# Altium PCB SAMV71_Xplained_Ultra.PcbDoc (part 2 of 7)
Units mm, origin at the board's own origin, x right, y up, seen from the top; angles counter-clockwise.
Board outline 90 x 135 mm, 8 copper layers (Top Layer LF-Signals, Ground Plane 1 (GND), Power Plane (VCC), Ground Plane 2 (GND), Signal Layer 1, Signal Layer 2, Ground Plane 3 (GND), Bottom Layer LF-Signals), stack 1.588 mm thick; 413 components, 342 nets, 1839 pads, 978 vias.
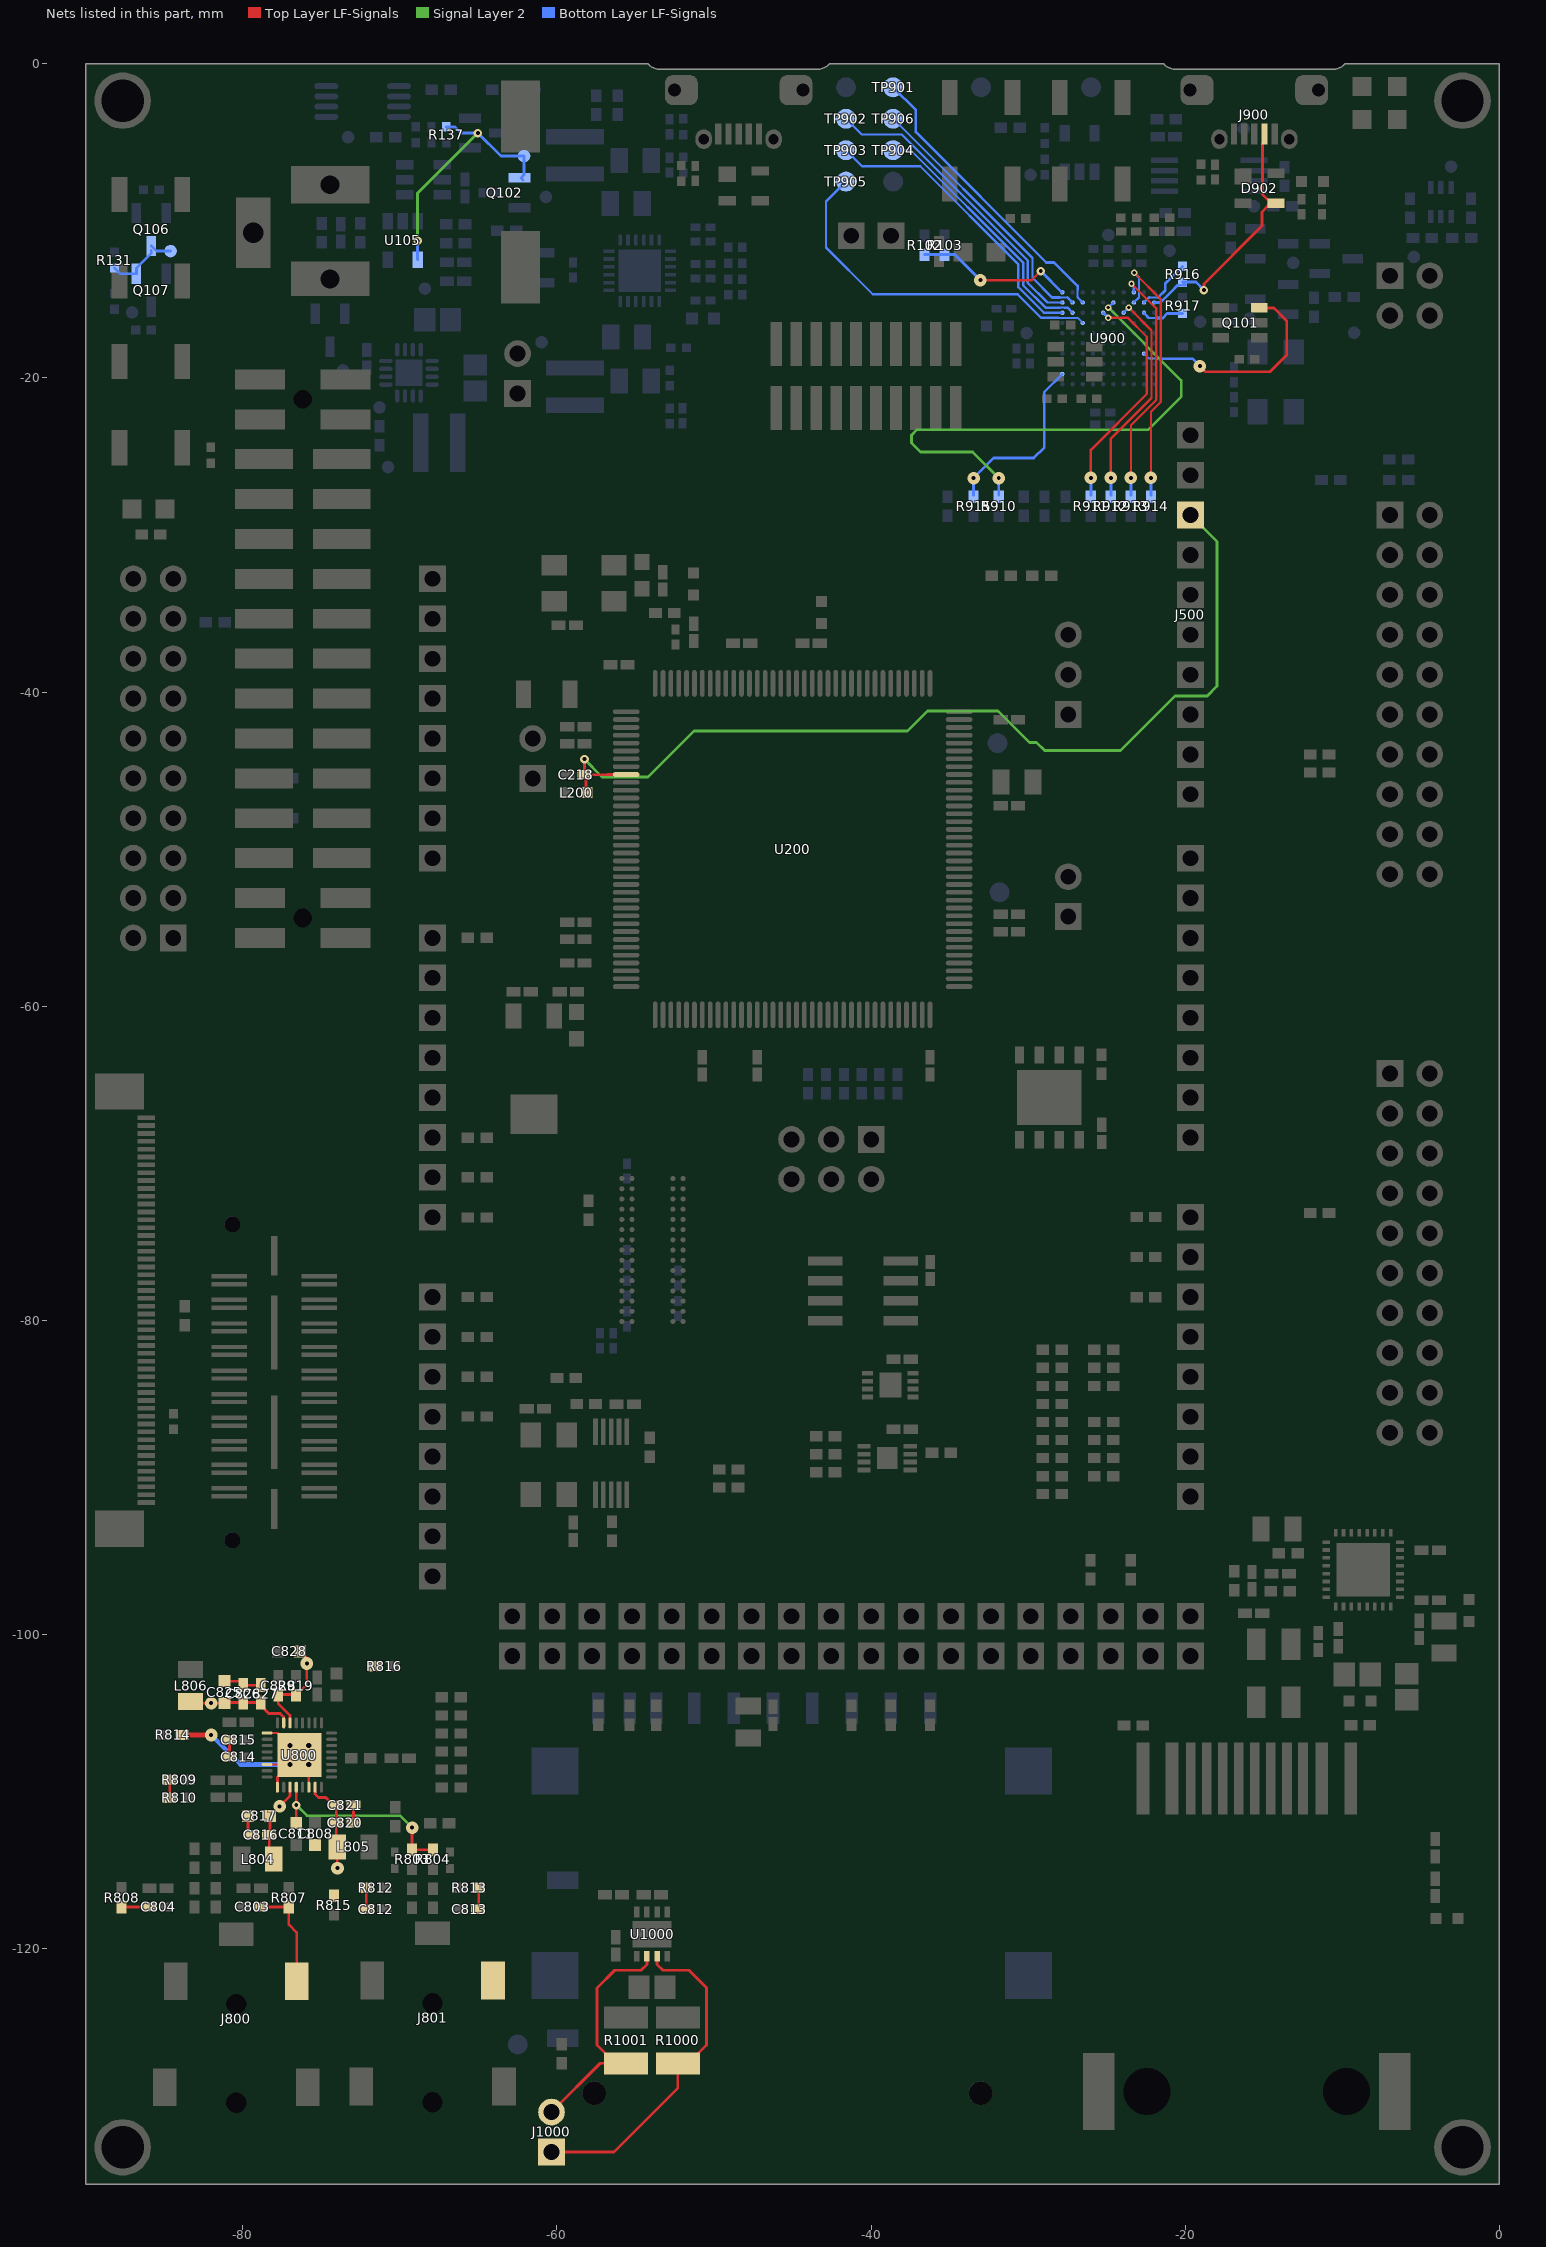
[diagram p8: the nets of this part, all layers, seen from the top]

## Footprints (in the part's own frame and the unit in brackets; to place one, negate y for a bottom-side part, rotate by r counter-clockwise, add the part's x,y. Pads: shape width x height; smd on the part's side, far side on the other; paste and mask are expansions set on the pad) (continued)
AP6-00206 [mm] "100 ball (10x10 array) VFBGA. Pitch 0.65 mm. Width: 7 mm. Length: 7mm. Height: 1 mm"
  round 0.28 smd: A1(-2.925,2.925) A2(-2.275,2.925) A3(-1.625,2.925) A4(-0.975,2.925) A5(-0.325,2.925) A6(0.325,2.925) A7(0.975,2.925) A8(1.625,2.925) A9(2.275,2.925) A10(2.925,2.925) B1(-2.925,2.275) B2(-2.275,2.275) B3(-1.625,2.275) B4(-0.975,2.275) B5(-0.325,2.275) B6(0.325,2.275) B7(0.975,2.275) B8(1.625,2.275) B9(2.275,2.275) B10(2.925,2.275) C1(-2.925,1.625) C2(-2.275,1.625) C3(-1.625,1.625) C4(-0.975,1.625) C5(-0.325,1.625) C6(0.325,1.625) C7(0.975,1.625) C8(1.625,1.625) C9(2.275,1.625) C10(2.925,1.625) D1(-2.925,0.975) D2(-2.275,0.975) D3(-1.625,0.975) D4(-0.975,0.975) D5(-0.325,0.975) D6(0.325,0.975) D7(0.975,0.975) D8(1.625,0.975) D9(2.275,0.975) D10(2.925,0.975) E1(-2.925,0.325) E2(-2.275,0.325) E3(-1.625,0.325) E4(-0.975,0.325) E5(-0.325,0.325) E6(0.325,0.325) E7(0.975,0.325) E8(1.625,0.325) E9(2.275,0.325) E10(2.925,0.325) F1(-2.925,-0.325) F2(-2.275,-0.325) F3(-1.625,-0.325) F4(-0.975,-0.325) F5(-0.325,-0.325) F6(0.325,-0.325) F7(0.975,-0.325) F8(1.625,-0.325) F9(2.275,-0.325) F10(2.925,-0.325) G1(-2.925,-0.975) G2(-2.275,-0.975) G3(-1.625,-0.975) G4(-0.975,-0.975) G5(-0.325,-0.975) G6(0.325,-0.975) G7(0.975,-0.975) G8(1.625,-0.975) G9(2.275,-0.975) G10(2.925,-0.975) H1(-2.925,-1.625) H2(-2.275,-1.625) H3(-1.625,-1.625) H4(-0.975,-1.625) H5(-0.325,-1.625) H6(0.325,-1.625) H7(0.975,-1.625) H8(1.625,-1.625) H9(2.275,-1.625) H10(2.925,-1.625) J1(-2.925,-2.275) J2(-2.275,-2.275) J3(-1.625,-2.275) J4(-0.975,-2.275) J5(-0.325,-2.275) J6(0.325,-2.275) J7(0.975,-2.275) J8(1.625,-2.275) J9(2.275,-2.275) J10(2.925,-2.275) K1(-2.925,-2.925) K2(-2.275,-2.925) K3(-1.625,-2.925) K4(-0.975,-2.925) K5(-0.325,-2.925) K6(0.325,-2.925) K7(0.975,-2.925) K8(1.625,-2.925) K9(2.275,-2.925) K10(2.925,-2.925)
  silkscreen extent -4.15,-4.15 4.15,4.15, body extent -3.5,-3.5 3.5,3.5, height 1.01
AP6-00313 [mm] "QFN, 16-Leads, Body 3,2x3,2mm (max), Pitch 0,50mm, IPC Medium Density"
  rect 1.7x1.7 smd paste-1.7: 0(0,0)
  oval 0.85x0.28 smd: 1(-1.475,0.75) 2(-1.475,0.25) 3(-1.475,-0.25) 4(-1.475,-0.75) 9(1.475,-0.75) 10(1.475,-0.25) 11(1.475,0.25) 12(1.475,0.75)
  oval 0.28x0.85 smd: 5(-0.75,-1.475) 6(-0.25,-1.475) 7(0.25,-1.475) 8(0.75,-1.475) 13(0.75,1.475) 14(0.25,1.475) 15(-0.25,1.475) 16(-0.75,1.475)
  silkscreen extent -2.17,-1.6 1.6,1.6, body extent -1.5,-1.5 1.5,1.5, height 0.9
AP6-00349 [mm] "QFN55-32LD-LP-1"
  rect 0.5x0.23 smd: 1(-2.35,1.75) 2(-2.35,1.25) 3(-2.35,0.75) 4(-2.35,0.25) 5(-2.35,-0.25) 6(-2.35,-0.75) 7(-2.35,-1.25) 8(-2.35,-1.75) 17(2.35,-1.75) 18(2.35,-1.25) 19(2.35,-0.75) 20(2.35,-0.25) 21(2.35,0.25) 22(2.35,0.75) 23(2.35,1.25) 24(2.35,1.75)
  rect 0.23x0.5 smd: 9(-1.75,-2.35) 10(-1.25,-2.35) 11(-0.75,-2.35) 12(-0.25,-2.35) 13(0.25,-2.35) 14(0.75,-2.35) 15(1.25,-2.35) 16(1.75,-2.35) 25(1.75,2.35) 26(1.25,2.35) 27(0.75,2.35) 28(0.25,2.35) 29(-0.25,2.35) 30(-0.75,2.35) 31(-1.25,2.35) 32(-1.75,2.35)
  rect 3.4x3.4 smd paste-1.7: 33(0,0)
  silkscreen extent -3,-3 3,3, body extent -2.51,-2.51 2.51,2.51, height 0.8
AP6-00380 [mm] "QFN24, 4x4mm, 0.5 pitch"
  round 0.6 on Bottom Paste: 0(-0.65,-0.65) 0(-0.65,0.65) 0(0,0) 0(0.65,-0.65) 0(0.65,0.65)
  rect 0.7x0.23 smd mask+0.05: 1(-1.95,1.25) 2(-1.95,0.75) 3(-1.95,0.25) 4(-1.95,-0.25) 5(-1.95,-0.75) 6(-1.95,-1.25) 13(1.95,-1.25) 14(1.95,-0.75) 15(1.95,-0.25) 16(1.95,0.25) 17(1.95,0.75) 18(1.95,1.25)
  rect 0.23x0.7 smd mask+0.05: 7(-1.25,-1.95) 8(-0.75,-1.95) 9(-0.25,-1.95) 10(0.25,-1.95) 11(0.75,-1.95) 12(1.25,-1.95) 19(1.25,1.95) 20(0.75,1.95) 21(0.25,1.95) 22(-0.25,1.95) 23(-0.75,1.95) 24(-1.25,1.95)
  rect 2.7x2.7 smd paste-2 mask+0.05: 25(0,0)
  silkscreen extent -2.47,-2.47 2.47,2.47, body extent -2,-2 2,2, height 1
AP6-00382 [mil] "VSSOP"
  oval 15x60 smd: 1(-38.39,-91.02) 2(-12.8,-91.02) 3(12.8,-91.02) 4(38.39,-91.02) 5(38.39,91.02) 6(12.8,91.02) 7(-12.8,91.02) 8(-38.39,91.02)
  silkscreen extent -95,-147 61,61, body extent -59,-96 59,97, height 37
AP6-00400 [mm] "FBGA60"
  round 0.32 smd mask+0.075: A1(-1.95,4.55) A2(-1.3,4.55) A6(1.3,4.55) A7(1.95,4.55) B1(-1.95,3.9) B2(-1.3,3.9) B6(1.3,3.9) B7(1.95,3.9) C1(-1.95,3.25) C2(-1.3,3.25) C6(1.3,3.25) C7(1.95,3.25) D1(-1.95,2.6) D2(-1.3,2.6) D6(1.3,2.6) D7(1.95,2.6) E1(-1.95,1.95) E2(-1.3,1.95) E6(1.3,1.95) E7(1.95,1.95) F1(-1.95,1.3) F2(-1.3,1.3) F6(1.3,1.3) F7(1.95,1.3) G1(-1.95,0.65) G2(-1.3,0.65) G6(1.3,0.65) G7(1.95,0.65) H1(-1.95,0) H2(-1.3,0) H6(1.3,0) H7(1.95,0) J1(-1.95,-0.65) J2(-1.3,-0.65) J6(1.3,-0.65) J7(1.95,-0.65) K1(-1.95,-1.3) K2(-1.3,-1.3) K6(1.3,-1.3) K7(1.95,-1.3) L1(-1.95,-1.95) L2(-1.3,-1.95) L6(1.3,-1.95) L7(1.95,-1.95) M1(-1.95,-2.6) M2(-1.3,-2.6) M6(1.3,-2.6) M7(1.95,-2.6) N1(-1.95,-3.25) N2(-1.3,-3.25) N6(1.3,-3.25) N7(1.95,-3.25) P1(-1.95,-3.9) P2(-1.3,-3.9) P6(1.3,-3.9) P7(1.95,-3.9) R1(-1.95,-4.55) R2(-1.3,-4.55) R6(1.3,-4.55) R7(1.95,-4.55)
  silkscreen extent -4.13,-5.3 3.45,5.3, body extent -3.25,-5.1 3.25,5.1, height 1.2
AP6-00402 [mm]
  rect 3.5x4.1 smd: 0(0,0)
  rect 1.1x0.6 smd: 1(-2.7,1.905) 2(-2.7,0.635) 3(-2.7,-0.635) 4(-2.7,-1.905) 5(2.7,-1.905) 6(2.7,-0.635) 7(2.7,0.635) 8(2.7,1.905)
  silkscreen extent -4.8,-2.7 3.5,2.7, body extent -3,-2.5 3,2.5, height 0.8
AP6-00407 [mm] "DFN8 package"
  rect 0.675x0.35 smd: 1(-1.412,0.975) 2(-1.412,0.325) 3(-1.412,-0.325) 4(-1.412,-0.975) 5(1.412,-0.975) 6(1.412,-0.325) 7(1.412,0.325) 8(1.412,0.975)
  rect 1.7x2.5 smd paste-3: 9(0,0)
  silkscreen extent -2.07,-1.75 1.95,1.88, body extent -1.55,-1.55 1.55,1.55, height 1
AP6-00409 [mm]
  rect 0.7x0.3 smd mask+0.075: 1(-1.45,0.75) 2(-1.45,0.25) 3(-1.45,-0.25) 4(-1.45,-0.75) 5(1.45,-0.75) 6(1.45,-0.25) 7(1.45,0.25) 8(1.45,0.75)
  rect 1.4x1.6 smd paste-0.025 mask+0.075: 9(0,0)
  silkscreen extent -2,-1.1 2,1.45, body extent -1.55,-1.05 1.55,1.05, height 0.6
AP6-00420 [mm] "QFN, 32-Leads, Body 4x4mm, Pitch 0.40mm, IPC Medium Density"
  oval 0.7x0.2 smd mask+0.05: 1(-2.05,1.4) 2(-2.05,1) 3(-2.05,0.6) 4(-2.05,0.2) 5(-2.05,-0.2) 6(-2.05,-0.6) 7(-2.05,-1) 8(-2.05,-1.4) 17(2.05,-1.4) 18(2.05,-1) 19(2.05,-0.6) 20(2.05,-0.2) 21(2.05,0.2) 22(2.05,0.6) 23(2.05,1) 24(2.05,1.4)
  oval 0.2x0.7 smd mask+0.05: 9(-1.4,-2.05) 10(-1,-2.05) 11(-0.6,-2.05) 12(-0.2,-2.05) 13(0.2,-2.05) 14(0.6,-2.05) 15(1,-2.05) 16(1.4,-2.05) 25(1.4,2.05) 26(1,2.05) 27(0.6,2.05) 28(0.2,2.05) 29(-0.2,2.05) 30(-0.6,2.05) 31(-1,2.05) 32(-1.4,2.05)
  rect 2.8x2.8 smd: 33(0,0)
  silkscreen extent -2.73,-2.1 2.1,2.15, body extent -2.08,-2.07 2.07,2.08, height 0.6
AP7-00039 [mm] "FOX FQ5032B"
  rect 1.6x1.3 smd: 1(-1.9,-1.15) 2(1.9,-1.15) 3(1.9,1.15) 4(-1.9,1.15)
  silkscreen extent -3,-2.1 3,2.1, body extent -2.5,-1.6 2.5,1.6, height 1
AP7-00044 [mm]
  rect 1x1.6 smd: 1(-1.3,0) 2(1.3,0)
  rect 3x2.5 smd: 3(0,6.25)
  silkscreen extent -2,-1 2,7.7, body extent -1.5,-0.7 1.5,7.4, height 2.08
AP7-00067 [mm]
  rect 2x1.2 smd: 1(-1.85,-1.1) 2(1.85,-1.1) 3(1.85,1.1) 4(-1.85,1.1)
  silkscreen extent -3.32,-2.15 3.2,2.05, body extent -2.5,-1.6 2.5,1.6, height 1
AP8-00010 [mm] "Testpad 50mil"
  round 1.27 smd paste-0.635: 1(0,0)
AP8-00137 [mm]
  rect 2.25x1 smd: 1(-2.75,2) 2(2.75,2) 3(-2.75,-2) 4(2.75,-2)
  silkscreen extent -4.25,-3.25 4.25,3.25, body extent -3.4,-3.21 3.4,3.22, height 3.47
AP8-00182 [mm] "Pin-in-Paste, Throughhole pin-header (2x3 array). Pitch 2.54 mm"
  rect 1.7x1.7 / inner round 1.7 / far side rect 1.7x1.7 hole 1: 1(-2.54,-1.27)
  rect 1.75x1.75 on Top Paste: 1(-2.54,-1.27) 2(-2.54,1.27) 3(0,-1.27) 4(0,1.27) 5(2.54,-1.27) 6(2.54,1.27)
  round 1.7 hole 1: 2(-2.54,1.27) 3(0,-1.27) 4(0,1.27) 5(2.54,-1.27) 6(2.54,1.27)
  silkscreen extent -3.8,-2.54 3.81,2.54, body extent -3.81,-2.54 3.81,2.54, height 8.56
AP8-00192 [mm]
  silkscreen extent -4,-4 3.86,4, body extent -3.97,-3.99 4,3.99, height 2.79
AP8-00259 [mm]
  rect 2.1x2.1 on Top Paste: 0(-21.59,-1.27) 0(-21.59,1.27) 0(-19.05,-1.27) 0(-19.05,1.27) 0(-16.51,-1.27) 0(-16.51,1.27) 0(-13.97,-1.27) 0(-13.97,1.27) 0(-11.43,-1.27) 0(-11.43,1.27) 0(-8.89,-1.27) 0(-8.89,1.27) 0(-6.35,-1.27) 0(-6.35,1.27) 0(-3.81,-1.27) 0(-3.81,1.27) 0(-1.27,1.27) 0(-1.27,-1.27) 0(1.27,1.27) 0(1.27,-1.27) 0(3.81,-1.27) 0(3.81,1.27) 0(6.35,-1.27) 0(6.35,1.27) 0(8.89,-1.27) 0(8.89,1.27) 0(11.43,-1.27) 0(11.43,1.27) 0(13.97,-1.27) 0(13.97,1.27) 0(16.51,-1.27) 0(16.51,1.27) 0(19.05,-1.27) 0(19.05,1.27) 0(21.59,-1.27) 0(21.59,1.27)
  rect 1.7x1.7 / inner round 1.7 / far side round 1.7 hole 1: 1(-21.59,-1.27) 2(-21.59,1.27) 3(-19.05,-1.27) 4(-19.05,1.27) 5(-16.51,-1.27) 6(-16.51,1.27) 7(-13.97,-1.27) 8(-13.97,1.27) 9(-11.43,-1.27) 10(-11.43,1.27) 11(-8.89,-1.27) 12(-8.89,1.27) 13(-6.35,-1.27) 14(-6.35,1.27) 15(-3.81,-1.27) 16(-3.81,1.27) 17(-1.27,-1.27) 18(-1.27,1.27) 19(1.27,-1.27) 20(1.27,1.27) 21(3.81,-1.27) 22(3.81,1.27) 23(6.35,-1.27) 24(6.35,1.27) 25(8.89,-1.27) 26(8.89,1.27) 27(11.43,-1.27) 28(11.43,1.27) 29(13.97,-1.27) 30(13.97,1.27) 31(16.51,-1.27) 32(16.51,1.27) 33(19.05,-1.27) 34(19.05,1.27) 35(21.59,-1.27) 36(21.59,1.27)
  silkscreen extent -23.3,-2.75 23.3,2.75, body extent -23.11,-2.53 23.11,2.43, height 8.52
AP8-00317 [mm] "Placement area for 18x6mm sticker"
  silkscreen extent 0,0 18,6
AP8-00367 [mm] "1x2 pin header, right angle, 2.54 mm pitch, through-hole"
  rect 1.7x1.7 / inner round 1.7 / far side round 1.7 hole 1: 1(-1.27,0) 2(1.27,0)
  silkscreen extent -2.65,-1.38 2.66,10.6, body extent -2.54,-0.33 2.54,9.99, height 2.55
AP8-00377 [mm]
  round 1.5 hole 1.5 unplated: 0(-12.575,14) 0(12.025,14)
  rect 0.8x2 smd paste+0 mask+0.2: 1(6.305,-10.5) 2(3.805,-10.5) 3(1.305,-10.5) 4(-1.195,-10.5) 5(-3.695,-10.5) 6(-6.195,-10.5) 7(-8.625,-10.5) 8(-10.325,-10.5) 9(8.805,-10.5) 10(-12.325,-10.5)
  rect 2x1.1 smd paste+0 mask+0.2: 11(-14.575,0.45) 12(-14.575,10.5)
  rect 3x3 smd paste+0 mask+0.2: 13(-15.075,-6.5) 14(-15.075,6.5) 15(15.075,6.5) 16(15.075,-6.5)
  silkscreen extent -14.1,-10.9 14.01,18.5, body extent -13.99,-9.5 14,18.5, height 2.7
AP8-00397 [mm] "3.5mm headphone jack"
  round 0 hole 1.3 unplated: 0(0,2.75) 0(0,-3.55)
  rect 1.5x2.4 smd: 1(-3.85,-5) 3(3.85,-5) 4(-4.55,1.75) 5(4.55,1.75)
  rect 2.2x1.5 smd: 2(0,-8)
  silkscreen extent -4.3,-7.75 4.3,7.75, body extent -4.59,-8.29 4.61,7.51, height 6
AP8-00525 [mm] "Jumper 2.54mm, 3D"
  body extent -2.49,0 2.49,5.97, height 2.52
AP8-00622 [mm] "2x10 Right angle 2.54mm THM"
  rect 1.7x1.7 / inner round 1.7 / far side rect 1.7x1.7 hole 1: 1(-11.43,-1.27)
  rect 2.1x2.1 on Top Paste: 1(-11.43,-1.27) 2(-11.43,1.27) 3(-8.89,-1.27) 4(-8.89,1.27) 5(-6.35,-1.27) 6(-6.35,1.27) 7(-3.81,-1.27) 8(-3.81,1.27) 9(-1.27,-1.27) 10(-1.27,1.27) 11(1.27,-1.27) 12(1.27,1.27) 13(3.81,-1.27) 14(3.81,1.27) 15(6.35,-1.27) 16(6.35,1.27) 17(8.89,-1.27) 18(8.89,1.27) 19(11.43,-1.27) 20(11.43,1.27)
  round 1.7 hole 1: 2(-11.43,1.27) 3(-8.89,-1.27) 4(-8.89,1.27) 5(-6.35,-1.27) 6(-6.35,1.27) 7(-3.81,-1.27) 8(-3.81,1.27) 9(-1.27,-1.27) 10(-1.27,1.27) 11(1.27,-1.27) 12(1.27,1.27) 13(3.81,-1.27) 14(3.81,1.27) 15(6.35,-1.27) 16(6.35,1.27) 17(8.89,-1.27) 18(8.89,1.27) 19(11.43,-1.27) 20(11.43,1.27)
  silkscreen extent -12.85,2.77 12.85,5.31, body extent -12.7,-1.59 12.7,11.29, height 5
AP8-00628 [mm] "2x2 Right angle 2.54mm THM"
  rect 1.7x1.7 / inner round 1.7 / far side rect 1.7x1.7 hole 1: 1(-1.27,-1.27)
  rect 2.1x2.1 on Top Paste: 1(-1.27,-1.27) 2(-1.27,1.27) 3(1.27,-1.27) 4(1.27,1.27)
  round 1.7 hole 1: 2(-1.27,1.27) 3(1.27,-1.27) 4(1.27,1.27)
  silkscreen extent -2.69,2.77 2.67,5.31, body extent -2.54,-1.52 2.54,11.36, height 5
AP8-00733 [mm] "Pin header 1x2 Pin in Paste"
  rect 1.7x1.7 / inner round 1.7 / far side rect 1.7x1.7 hole 1: 1(-1.27,0)
  rect 2.1x2.1 on Top Paste: 1(-1.27,0) 2(1.27,0)
  round 1.7 hole 1: 2(1.27,0)
  silkscreen extent -2.54,-1.48 2.54,1.48, body extent -2.54,-1.27 2.54,1.27, height 8.38
AP8-00744 [mm] "Pin header, 2x10, 2.54mm, THM, 1mm hole"
  rect 1.7x1.7 / inner round 1.7 / far side rect 1.7x1.7 hole 1: 1(-11.43,-1.27)
  rect 2.1x2.1 on Top Paste: 1(-11.43,-1.27) 2(-11.43,1.27) 3(-8.89,-1.27) 4(-8.89,1.27) 5(-6.35,-1.27) 6(-6.35,1.27) 7(-3.81,-1.27) 8(-3.81,1.27) 9(-1.27,-1.27) 10(-1.27,1.27) 11(1.27,-1.27) 12(1.27,1.27) 13(3.81,-1.27) 14(3.81,1.27) 15(6.35,-1.27) 16(6.35,1.27) 17(8.89,-1.27) 18(8.89,1.27) 19(11.43,-1.27) 20(11.43,1.27)
  round 1.7 hole 1: 2(-11.43,1.27) 3(-8.89,-1.27) 4(-8.89,1.27) 5(-6.35,-1.27) 6(-6.35,1.27) 7(-3.81,-1.27) 8(-3.81,1.27) 9(-1.27,-1.27) 10(-1.27,1.27) 11(1.27,-1.27) 12(1.27,1.27) 13(3.81,-1.27) 14(3.81,1.27) 15(6.35,-1.27) 16(6.35,1.27) 17(8.89,-1.27) 18(8.89,1.27) 19(11.43,-1.27) 20(11.43,1.27)
  silkscreen extent -12.7,-2.75 12.7,2.75, body extent -12.7,-2.54 12.7,2.54, height 8.4
AP8-00745 [mm] "THM Pin-header 1x3 100mil pitch, 1mm hole"
  rect 1.7x1.7 / inner round 1.7 / far side rect 1.7x1.7 hole 1: 1(-2.54,0)
  rect 2.1x2.1 on Top Paste: 1(-2.54,0) 2(0,0) 3(2.54,0)
  round 1.7 hole 1: 2(0,0) 3(2.54,0)
  silkscreen extent -3.81,-1.48 3.81,1.48, body extent -3.81,-1.27 3.81,1.27, height 8.38
AP8-00749 [mm]
  rect 0x0 hole 3 unplated: 0(-6.35,7.97) 0(6.35,7.97)
  rect 0.81x4.6 smd: 1(-6.61,-11.95) 2(-4.77,-11.95) 11(4.77,-11.95) 12(6.61,-11.95)
  rect 0.61x4.6 smd: 3(-3.57,-11.95) 4(-2.55,-11.95) 5(-1.53,-11.95) 6(-0.51,-11.95) 7(0.51,-11.95) 8(1.53,-11.95) 9(2.55,-11.95) 10(3.57,-11.95)
  rect 2x4.9 smd: 13(-9.42,7.97) 14(9.42,7.97)
  Top Layer LF-Signals region: -10.42,5.52 -10.42,10.42 -7.42,10.42 -7.42,9.484 -7.42,9.485 -7.419,9.48 -7.993,8.82 -8.2,7.97 -7.993,7.12 -7.419,6.46 -7.419,6.46 -7.42,6.46 -7.42,5.52
  Top Layer LF-Signals region: 7.42,5.52 7.42,6.456 7.419,6.46 7.993,7.12 8.2,7.97 7.993,8.82 7.419,9.48 7.419,9.48 7.42,9.48 7.42,10.42 10.42,10.42 10.42,5.52
  silkscreen extent -11,-14.7 11,13.25, body extent -9.65,-13.34 9.65,13.4, height 15.2
AP8-00774 [mm] "50 pin single sided FPC connector 5-1734839-0"
  rect 2.3x3.1 smd: 0(-13.92,0.3) 0(13.92,0.3)
  rect 0.3x1.1 smd: 1(-12.25,2) 2(-11.75,2) 3(-11.25,2) 4(-10.75,2) 5(-10.25,2) 6(-9.75,2) 7(-9.25,2) 8(-8.75,2) 9(-8.25,2) 10(-7.75,2) 11(-7.25,2) 12(-6.75,2) 13(-6.25,2) 14(-5.75,2) 15(-5.25,2) 16(-4.75,2) 17(-4.25,2) 18(-3.75,2) 19(-3.25,2) 20(-2.75,2) 21(-2.25,2) 22(-1.75,2) 23(-1.25,2) 24(-0.75,2) 25(-0.25,2) 26(0.25,2) 27(0.75,2) 28(1.25,2) 29(1.75,2) 30(2.25,2) 31(2.75,2) 32(3.25,2) 33(3.75,2) 34(4.25,2) 35(4.75,2) 36(5.25,2) 37(5.75,2) 38(6.25,2) 39(6.75,2) 40(7.25,2) 41(7.75,2) 42(8.25,2) 43(8.75,2) 44(9.25,2) 45(9.75,2) 46(10.25,2) 47(10.75,2) 48(11.25,2) 49(11.75,2) 50(12.25,2)
  silkscreen extent -15.51,-1.85 15.5,3.18, body extent -15.22,-2.55 15.21,2.56, height 2.03
AP8-00822 [mm]
  rect 1.7x1.7 / inner round 1.7 / far side round 1.7 hole 1: 1(-11.43,0) 2(-8.89,0) 3(-6.35,0) 4(-3.81,0) 5(-1.27,0) 6(1.27,0) 7(3.81,0) 8(6.35,0) 9(8.89,0) 10(11.43,0)
  rect 2.1x2.1 on Top Paste: 1(-11.43,0) 2(-8.89,0) 3(-6.35,0) 4(-3.81,0) 5(-1.27,0) 6(1.27,0) 7(3.81,0) 8(6.35,0) 9(8.89,0) 10(11.43,0)
  silkscreen extent -13.21,-1.4 13.21,1.4, body extent -12.95,-1.21 12.95,1.21, height 8.51
AP8-00823 [mm]
  rect 1.7x1.7 / inner round 1.7 / far side round 1.7 hole 1: 1(-8.89,0) 2(-6.35,0) 3(-3.81,0) 4(-1.27,0) 5(1.27,0) 6(3.81,0) 7(6.35,0) 8(8.89,0)
  rect 2.1x2.1 on Top Paste: 1(-8.89,0) 2(-6.35,0) 3(-3.81,0) 4(-1.27,0) 5(1.27,0) 6(3.81,0) 7(6.35,0) 8(8.89,0)
  silkscreen extent -10.67,-1.4 10.67,1.4, body extent -10.41,-1.21 10.41,1.21, height 8.51
AP8-00852 [mm] "Hirose, ZX Series, USB Micro-AB Recept-RA"
  rect 0.4x1.35 smd: 1(-1.3,2.8) 2(-0.65,2.8) 3(0,2.8) 4(0.65,2.8) 5(1.3,2.8)
  rrect52% 2.1x1.9 hole 0.825 slot 1.5 at 90 deg copper offset 0.437,0: 6(-4.088,0)
  rrect52% 2.1x1.9 on Top Paste: 6(-3.6,0) 7(3.6,0)
  rrect52% 2.1x1.9 hole 0.825 slot 1.5 at 90 deg copper offset -0.437,0: 7(4.088,0)
  rrect100% 1.05x1.25 hole 0.65 slot 0.85 at 90 deg: 8(-2.225,3.125) 9(2.225,3.125)
  rrect100% 1.05x1.25 on Top Paste: 8(-2.225,3.125) 9(2.225,3.125)
  Top Layer LF-Signals region: 0.25,-0.95 2.05,-0.95 2.05,0.95 0.25,0.95
  Top Layer LF-Signals region: -2.05,-0.95 -0.25,-0.95 -0.25,0.95 -2.05,0.95
  Top Layer LF-Signals region: 2.6,-0.95 4.2,-0.95 4.294,-0.941 4.381,-0.915 4.434,-0.891 4.48,-0.862 4.52,-0.832 4.565,-0.791 4.596,-0.753 4.622,-0.716 4.647,-0.673 4.66,-0.64 4.676,-0.6 4.688,-0.55 4.696,-0.505 4.7,-0.45 4.7,0.45 4.696,0.503 4.689,0.548 4.677,0.599 4.661,0.641 4.641,0.683 4.617,0.724 4.589,0.761 4.56,0.797 4.521,0.831 4.483,0.86 4.439,0.888 4.397,0.908 4.354,0.924 4.301,0.939 4.248,0.946 4.2,0.95 2.6,0.95
  Top Layer LF-Signals region: -2.6,0.95 -4.2,0.95 -4.294,0.941 -4.381,0.915 -4.434,0.891 -4.48,0.862 -4.52,0.832 -4.565,0.791 -4.596,0.753 -4.622,0.716 -4.647,0.673 -4.66,0.64 -4.676,0.6 -4.688,0.55 -4.696,0.505 -4.7,0.45 -4.7,-0.45 -4.696,-0.503 -4.689,-0.548 -4.677,-0.599 -4.661,-0.641 -4.641,-0.683 -4.617,-0.724 -4.589,-0.761 -4.56,-0.797 -4.521,-0.831 -4.483,-0.86 -4.439,-0.888 -4.397,-0.908 -4.354,-0.924 -4.301,-0.939 -4.248,-0.946 -4.2,-0.95 -2.6,-0.95
  Top Layer LF-Signals pour cut-out: -3.75,1.975 3.75,1.975 3.75,-1.325 -3.75,-1.325
  Bottom Layer LF-Signals region: -2.6,0.95 -4.2,0.95 -4.294,0.941 -4.381,0.915 -4.434,0.891 -4.48,0.862 -4.52,0.832 -4.565,0.791 -4.596,0.753 -4.622,0.716 -4.647,0.673 -4.66,0.64 -4.676,0.6 -4.688,0.55 -4.696,0.505 -4.7,0.45 -4.7,-0.45 -4.696,-0.503 -4.689,-0.548 -4.677,-0.599 -4.661,-0.641 -4.641,-0.683 -4.617,-0.724 -4.589,-0.761 -4.56,-0.797 -4.521,-0.831 -4.483,-0.86 -4.439,-0.888 -4.397,-0.908 -4.354,-0.924 -4.301,-0.939 -4.248,-0.946 -4.2,-0.95 -2.6,-0.95
  Bottom Layer LF-Signals region: 2.6,-0.95 4.2,-0.95 4.294,-0.941 4.381,-0.915 4.434,-0.891 4.48,-0.862 4.52,-0.832 4.565,-0.791 4.596,-0.753 4.622,-0.716 4.647,-0.673 4.66,-0.64 4.676,-0.6 4.688,-0.55 4.696,-0.505 4.7,-0.45 4.7,0.45 4.696,0.503 4.689,0.548 4.677,0.599 4.661,0.641 4.641,0.683 4.617,0.724 4.589,0.761 4.56,0.797 4.521,0.831 4.483,0.86 4.439,0.888 4.397,0.908 4.354,0.924 4.301,0.939 4.248,0.946 4.2,0.95 2.6,0.95
  silkscreen extent -4.05,1.22 4.05,3.13, body extent -4.32,-2.65 4.33,3.25, height 2.78
AP8-00853 [mm]
  rect 2.4x5 hole 1.2 slot 3 at 90 deg: 1(0,0)
  rect 4.5x2.2 hole 1.3 slot 3 at 0 deg: 2(3.05,-4.9)
  rect 2.2x5 hole 1.2 slot 3.5 at 90 deg: 3(6,0)
  silkscreen extent -7.2,-5 7.3,5, body extent -7.6,-5 6.88,4.47, height 11.18
AP8-00878 [mm] "SAMTEC 0.5mm, 20-pair, High-Speed Differential Pair Socket"
  round 1.02 hole 1.02 unplated: 0(-2.67,-10.06) 0(-2.67,10.06)
  rect 2.27x0.28 smd: 1(2.87,-7.25) 2(-2.87,-7.25) 3(2.87,-6.75) 4(-2.87,-6.75) 5(2.87,-5.75) 6(-2.87,-5.75) 7(2.87,-5.25) 8(-2.87,-5.25) 9(2.87,-4.25) 10(-2.87,-4.25) 11(2.87,-3.75) 12(-2.87,-3.75) 13(2.87,-2.75) 14(-2.87,-2.75) 15(2.87,-2.25) 16(-2.87,-2.25) 17(2.87,-1.25) 18(-2.87,-1.25) 19(2.87,-0.75) 20(-2.87,-0.75) 21(2.87,0.25) 22(-2.87,0.25) 23(2.87,0.75) 24(-2.87,0.75) 25(2.87,1.75) 26(-2.87,1.75) 27(2.87,2.25) 28(-2.87,2.25) 29(2.87,3.25) 30(-2.87,3.25) 31(2.87,3.75) 32(-2.87,3.75) 33(2.87,4.75) 34(-2.87,4.75) 35(2.87,5.25) 36(-2.87,5.25) 37(2.87,6.25) 38(-2.87,6.25) 39(2.87,6.75) 40(-2.87,6.75)
  rect 0.43x2.54 smd: 41(0,-8.065) 44(0,8.065)
  rect 0.43x4.7 smd: 42(0,-3.175) 43(0,3.175)
  silkscreen extent -3.9,-10.9 4.95,10.9, body extent -3.75,-10.67 3.75,10.64, height 3.05
AP8-00884 [mil]
  round 39.37 hole 46.85 unplated: 0(-650,0) 1(650,0)
  rect 50x125.98 smd: 1(-700,-107.01) 2(-700,107.01) 3(-600,-107.01) 4(-600,107.01) 27(600,-107.01) 28(600,107.01) 29(700,-107.01) 30(700,107.01)
  rect 50x145 smd: 5(-500,-97.5) 6(-500,97.5) 7(-400,-97.5) 8(-400,97.5) 9(-300,-97.5) 10(-300,97.5) 11(-200,-97.5) 12(-200,97.5) 13(-100,-97.5) 14(-100,97.5) 15(0,-97.5) 16(0,97.5) 17(100,-97.5) 18(100,97.5) 19(200,-97.5) 20(200,97.5) 21(300,-97.5) 22(300,97.5) 23(400,-97.5) 24(400,97.5) 25(500,-97.5) 26(500,97.5)
  Top Layer LF-Signals region: 575,-169.88 575,-25 607.28,-25 625,-42.72 625,-169.88
  Top Layer LF-Signals region: 725,-169.88 725,-25 692.72,-25 675,-42.72 675,-169.88
  Top Layer LF-Signals region: 575,169.88 575,25 607.28,25 625,42.72 625,169.88
  Top Layer LF-Signals region: 725,169.88 725,25 692.72,25 675,42.72 675,169.88
  Top Layer LF-Signals region: -575,169.88 -575,25 -607.28,25 -625,42.72 -625,169.88
  Top Layer LF-Signals region: -725,169.88 -725,25 -692.72,25 -675,42.72 -675,169.88
  Top Layer LF-Signals region: -575,-169.88 -575,-25 -607.28,-25 -625,-42.72 -625,-169.88
  Top Layer LF-Signals region: -725,-169.88 -725,-25 -692.72,-25 -675,-42.72 -675,-169.88
  silkscreen extent -760,-189 760,189, body extent -750,-145 750,145, height 380
AP8-00910 [mm] "FTSH-110-01-F-DV-007-K"
  rect 2.79x0.74 smd: 1(-2.035,5.715) 2(2.035,5.715) 3(-2.035,4.445) 4(2.035,4.445) 5(-2.035,3.175) 6(2.035,3.175) 7(-2.035,1.905) 8(2.035,1.905) 9(-2.035,0.635) 10(2.035,0.635) 11(-2.035,-0.635) 12(2.035,-0.635) 13(-2.035,-1.905) 14(2.035,-1.905) 15(-2.035,-3.175) 16(2.035,-3.175) 17(-2.035,-4.445) 18(2.035,-4.445) 19(-2.035,-5.715) 20(2.035,-5.715)
  silkscreen extent -4.59,-2.54 4.45,7.13, body extent -2.92,-6.31 2.92,6.31, height 6.11
AP9-00044 [mm]
  rect 1x0.95 smd paste-1: 1(-0.85,0) 2(0.85,0)
  Top Layer LF-Signals region: -0.45,-0.15 0.45,-0.15 0.45,0.15 -0.45,0.15
  silkscreen extent -1.6,-0.72 1.6,0.72, body extent -0.8,-0.4 0.8,0.4, height 0.3

## Part data
C100 C701 C703: library part A01-0500, "Ceramic capacitor, SMD 0805, X5R, 10V, ±20%"
C101: library part A01-0634, "Ceramic capacitor, SMD 0805, X5R, 25V, ±10%"
C102: library part A01-0044, "Ceramic capacitor, SMD 0402, X7R, 25V, +/-10%"
C103: library part A01-0679, "Electric Double-Layer (Supercapacitor), 100mF, SMD, 10.5mm diameter, 25Ω ESR"
C104: library part A01-0050, "Ceramic capacitor, SMD 0402, X7R, 25V, +/-10%"
C105 C106 C121 C122 C124 C125 C200 C201 C202 C203 C204 C205 C206 C207 C208 C209 C210 C211 C212 C213 C214 C217 C218 C600 C601 C602 C604 C605 C606 C607 C608 C609 C610 C611 C613 C700 C702 C705 C706 C707 C710 C711 C713 C801 C802 C806 C807 C816 C818 C821 C822 C826 C829 C904 C910 C911 C912 C913 C1002 C1003: library part A01-0246, "Ceramic capacitor, SMD 0402, X7R, 16V, +/-10%"
C107 C808 C811 C817 C819 C825 C828: library part A01-0377, "Ceramic capacitor, SMD 0603, X5R, 10V, 10% (de31036)"
C108 C109 C110 C111 C603 C810 C820 C905 C909 C914 C915: library part A01-0300, "Ceramic capacitor, SMD 0402, X5R, 6.3V, +/-20%"
C112 C113 C115 C117 C612: library part A01-0360, "Ceramic capacitor, SMD 0805, X5R, 10V, 10 %, (de19441)"
C114: library part A01-0014, "Ceramic capacitor, SMD 0402, NP0, 50V, +/-5%"
C116: library part A01-0013, "Ceramic capacitor, SMD 0402, NP0, 50V, +/-5%"
C118: library part A01-0021, "Ceramic capacitor, SMD 0402, NP0, 50V, +/-5%"
C119 C120 C805 C809: library part A01-0447, "Ceramic capacitor, SMD 0402, X5R, 10V, ±10 %"
C123 C1001: library part A01-0017, "Ceramic capacitor, SMD 0402, NP0, 50V, +/-5%"
C215: library part A01-0492, "Capacitor Tantalum 10V 2.2uF 10% ESR = 6 ohm"
C216 C708 C712: library part A01-0360, "Ceramic capacitor, SMD 0805, X7R, 10V, 10 %, (de19441)"
C219 C902: library part A01-0015, "Ceramic capacitor, SMD 0402, NP0, 50V, +/-5%"
C300 C301: library part A01-0011, "Ceramic capacitor, SMD 0402, NP0, 50V, +/-0.25pF"
C302 C303: library part A01-0016, "Ceramic capacitor, SMD 0402, NP0, 50V, +/-5%"
C304 C903: library part A01-0046, "Ceramic capacitor, SMD 0402, X7R, 25V, +/-10%"
C704 C709 C800 C900 C901: library part A01-0019, "Ceramic capacitor, SMD 0402, NP0, 50V, +/-5%"
C803 C804 C812 C813: library part A01-0034, "Ceramic capacitor, SMD 0402, X7R, 50V, +/-10%"
C814 C815: library part A01-0347, "Ceramic capacitor, SMD 0402, X5R, 6.3V, +/-20% (de33687)"
C823 C824: library part A01-0022, "Ceramic capacitor, SMD 0402, NP0, 50V, +/-5%"
C827 C906 C907 C908: library part A01-0321, "Ceramic capacitor, SMD 0402, C0G, 50V, +/-5%"
C1000: library part A01-0400, "Ceramic capacitor, SMD 0805, X5R, 25V, ±10 %"
D100: library part A04-0064, "Schottky double Diodes, NXP, SOT23-3"
D101: library part A04-0001, "Schottky diode, V(rrm)=30V, I(f)=0.1A, V(f)=0.4V (at If = 0.01A), I(r)=0.5uA (at Vrrm), t(rr)=5ns, SMD SOT23"
D300 D301 D901: library part A10-0019, "LED, Yellow, Wave length=591nm, SMD 0805, ±70°"
D302 D902: library part A06-0236, "Double rail-to-rail USB ESD protection diode"
D900: library part A10-0018, "LED, Green, Wave length=575nm, SMD 0805, ±70°"
E1 E2 E3 E4: library part A08-0053, "2.8mm adhesive feet,diam 8.0mm"
J100: library part A08-2120, "Through hole DC jack 2.1mm, 12V, 3A"
J101: library part A08-1519, "Pin header, 2x2, Right Angle, 2.54mm, THT, Pin In Paste"
J102: library part A08-0764, "1x2 pin header, right angle, 2.54 mm pitch, through-hole"
J103 J200 J201 J1000: library part A08-1754, "1x2 pin header, 2.54mm pitch, Pin-in-Paste THM"
J202: library part A08-1799, "1x3 pin header, 2.54mm pitch, Pin-in-Paste THM, 1mm hole"
J300 J301: library part A09-0783, "Default closed SMD strap, 0603 size"
J302 J900: library part A08-2112, "Micro USB AB Connector, Standard SMT + DIP"
J400: library part A08-2225, "Samtec TSM series, 2x15 pin header, straight, 2.54mm pitch SMD, locking leads."
J401 J402: library part A08-1513, "Pin header, 2x10, Right Angle, 2.54mm, THM, Pin In Paste"
J403: library part A08-2290, "SAMTEC FTSH series 50-mil header, shrouded, pin 7 removed, SMD"
J404: library part A08-1886, "50 pin FPC connector, e=0.5mm, single side contact (top)."
J405: library part A08-2204, "SAMTEC 0.5mm, 20-pair, High-Speed Differential Pair Socket"
J406: library part A08-1801, "2x10 pin header, 2.54mm pitch, Pin-in-Paste THM, 1mm hole"
J500: library part A08-2026, "1x10 receptacle pin header, low insertion force, 2.54mm pitch THM, Pin in Paste"
J501 J502 J503 J504 J505: library part A08-2025, "1x8 receptacle pin header, low insertion force, 2.54mm pitch THM, Pin in Paste"
J506: library part A08-1654, "2x3 pin header, 2.54mm pitch, Pin-in-Paste THM"
J507: library part A08-0387, "2x18 female pin header, 2.54mm pitch, THM"
J600: library part A08-0816, "SD/MMC socket, 2.7mm, push-push, SMD"
J700: library part A08-1816, "10/100Base-TX, SMD, RJ45, green and yellow LEDs, integrated magnetics"
J800 J801: library part A08-0886, "3.5mm stereo phone jack"
JS100 JS101 JS200 JS201 JS202: library part A08-0543, "Jumper cap for 2.54mm pinheader"
L100 L101 L102: library part A03-0197, "2.2µH Shielded Power Inductor, 4x4x2mm, Isat=5.6A , Irms=4.0A , DCR=35.2mΩ"
L200 L201 L202 L700 L701 L702 L900 L901: library part A03-0035, "SMD RF inductor 0603. Z=470Ohm (@100MHz), Max R(dc)=0.65Ohm, Max current=1A"
L800 L801 L802 L803: library part A03-0142, "FERRITE CHIP 80 OHM 1500MA 0402"
L804 L805 L806: library part A03-0167, "SMD EMI FERRITE 0805, Z=120 ohm(@100MHz), Max R(dc)=0.03 ohm, Max current=3A, (Digikey:490-5986-2-ND)"
LABEL1: library part A09-0611, "PCBA identification label PP Top White Gloss"
Q100: library part A05-0023, "P-ch. MOSFET. -30V, -3.0A continuous, -24A Peak. RDS(ON)=0.098Ohm@VGS=-10V, RDS(ON)=0.165Ohm@VGS=-4.5V, -2.5V<VGS(th)<-1.0V"
Q101 Q108: library part A05-0040, "Dual N/P-ch MOSFET, 20V, 2.7A/-1.9A cont, 8A/-8A pulse, RDS(ON)<0.08/0.17Ohm@VGS=4.5V, VGS(th)<1.5/-1.5V, SSOT6"
Q102: library part A05-0134, "P-channel Power MOSFET,30V, 520mA continuous drain current"
Q103 Q104 Q106: library part A05-0087, "P-ch. MOSFET. -30V, -3.7A continuous,RDS(ON)=0.05Ohm@VGS=-4,5V, RDS(ON)=0.08Ohm@VGS=-2.5V"
Q105 Q107: library part A05-0085, "N-Channel MOSFET. 60V, 0.300A continuous, 1.2A Peak. RDS(ON) = 3.8Ohm@VGS=4.5V, VGS(th)<2.5V"
Q900: library part A05-0051, "Dual N-Channel MOSFET, 60V, 115mA cont,RDS(ON) < 7.5 Ohm @50mA@5V, SOT-363"
R100 R920: library part A02-0163, "Thick film resistor, SMD 0402, 1/16W, 1%"
R101 R106 R114 R120 R121 R126 R134 R137 R140 R141 R142 R404 R604 R605 R607 R608 R609 R610 R702: library part A02-0260, "Thick film resistor, SMD 0402, 1/16W, 1%"
R102 R103 R119 R136 R306 R812 R813: library part A02-0252, "Thick film resistor, SMD 0402, 1/16W, 1%"
R104 R305: library part A02-0247, "Thick film resistor, SMD 0402, 1/16W, 1%"
R105 R116 R117 R127 R131 R135: library part A02-0276, "Thick film resistor, SMD 0402, 1/16W, 1%"
R107 R139 R302 R303 R307 R900 R904 R905 R907 R908 R910 R911 R912 R913 R914 R915 R921: library part A02-0200, "Thick film resistor, SMD 0402, 1/16W, 1%"
R108: library part A02-0204, "Thick film resistor, SMD 0402, 1/16W, 1%"
R109 R112 R200 R201 R202 R203 R207 R208 R209 R211 R213 R215 R216 R217 R218 R219 R220 R221 R222 R223 R224 R225 R226 R228 R229 R230 R234 R400 R401 R402 R403 R800 R802 R806 R811 R814 R815 R816 R818 R819: library part A02-0163, "RES 0.0 OHM 1/16W 0402 SMD"
R110 R204 R205 R206 R212 R214 R227 R300 R301 R817 R916 R917: library part A02-0178, "Thick film resistor, SMD 0402, 1/16W, 1%"
R111 R122: library part A02-0925, "Thick film resistor, SMD 0402, 1/16W, 1%"
R113 R304 R906 R909 R919: library part A02-0284, "Thick film resistor, SMD 0402, 1/16W, 1%"
R115: library part A02-0250, "Thick film resistor, SMD 0402, 1/16W, 1%"
R118: library part A02-0202, "Thick film resistor, SMD 0402, 1/16W, 1%"
R123: library part A02-0264, "Thick film resistor, SMD 0402, 1/16W, 1%"
R124: library part A02-0278, "Thick film resistor, SMD 0402, 1/16W, 1%"
R125 R133: library part A02-0267, "Thick film resistor, SMD 0402, 1/16W, 1%"
R128: library part A02-0923, "Thick film resistor, SMD 0402, 1/16W, 1%"
R129 R600 R601 R602 R603 R606 R611 R612: library part A02-0236, "Thick film resistor, SMD 0402, 1/16W, 1%"
R130: library part A02-0927, "Thick film resistor, SMD 0402, 1/16W, 1%"
R132: library part A02-0924, "Thick film resistor, SMD 0402, 1/16W, 1%"
R138: library part A02-0266, "Thick film resistor, SMD 0402, 1/16W, 1%"
R231 R232 R705 R707 R708 R709 R710 R711 R712 R713 R714 R715 R716 R717 R718 R719 R720: library part A02-0228, "Thick film resistor, SMD 0402, 1/16W, 1%"
R233: library part A02-0929, "Thick film resistor, SMD 0402, 1/16W, 1%"
R700 R706 R901 R902 R903: library part A02-0212, "Thick film resistor, SMD 0402, 1/16W, 1%"
R701 R703: library part A02-0196, "Thick film resistor, SMD 0402, 1/16W, 1%"
R704: library part A02-0914, "Thick film resistor, SMD 0402, 1/16W, 1%, E192"
R801: library part A02-0172, "Thick film resistor, SMD 0402, 1/16W, 1% (de23607)"
R803 R804: library part A02-0220, "Thick film resistor, SMD 0402, 1/16W, 1%"
R807 R808 R809 R810: library part A02-0171, "Thick film resistor, SMD 0402, 1/16W, 1%"
R918: library part A02-0539, "Thick film resistor, SMD 0402, 1/16W, 1%"
R1000 R1001: library part A02-0760, "Thick film resistor, SMD 1210, 0.5W, 1%"
SW100 SW101 SW300 SW301: library part A08-0790, "6.2x6.2 mm SMD tact switch, same as A08-0091 but less force is needed"
TP100 TP200 TP201 TP300 TP600 TP900 TP901 TP902 TP903 TP904 TP905 TP906 TP907: library part A08-0004, "Single SMD testpad"
U100: library part A06-1167, "5V to 17V in, 5V 2A out, Step-Down Converter"
U101: library part A06-1100, "Backup battery supervisors for RAM retention"
U102: library part A06-0068, "Autoswitching 2:1 Power Mux"
U103: library part A06-1087, "Single channel power switch, 1A, reverse block, active low enabled."
U104: library part A06-1165, "Externally Programmable Dual High-Current Step-Down DC/DC and Dual Linear Regulators"
U105: library part A06-1239, "Single, Low Voltage (1.6-5.5V), Low Power (0.35µA), low cost"
U106: library part A06-1104, "1.65V to 5.5V SPDT Analog switch"
U200: library part A06-1254, "SAM 32-bit ARM Cortex-M* RISC MCU, SAMV71 Series, QFP144"
U600: library part A06-1169, "2kbit I2C EEPROM, single EUI-48 MAC, 1.7-5.5V, 2x3mm UDFN (8MA2)"
U601: library part A06-1155, "16Mbit  SDRAM (512K Words x 16 Bits x 2 Banks), 143 MHz 3,3V"
U602: library part A06-1181, "Secure authentication and product validation device, EEPROM, I2C, 2.0 - 5.5V, UDFN8"
U603: library part A06-1182, "Secure authentication and product validation device, EEPROM, I2C, 2.0 - 5.5V, SOIC8"
U604: library part A06-1162, "16 Mbit (2MB) SPI Quad I/O flash, 3.3V, 108MHz, WSON-8, industrial temperature"
U700: library part A06-1163, "10Base-T/100Base-TX PHY, RMII, EEE, 50MHz clock output, AEC-Q100 Automotive"
U800: library part A06-1156, "Ultra Low Power Codec for Portable Audio Applications"
U801: library part A06-1177, "Programmable Phase-Locked Loop Clock Generator"
U900: library part A06-0736, "AVR 32-bit RISC MCU"
U1000: library part A06-1172, "5Mbit/s CAN Trasceiver,VCC = 5V, VIO = 2.8-5V, 3x3 mm VDFN8"
XC300: library part A07-0052, "32k768 crystal, +-20ppm, CL=7pF, max ESR 60kOhm, SMD"
XC301 XC800 XC900: library part A07-0042, "Fox FQ5032B 12.0MHz SMD crystal 738B-12"
XC700: library part A07-0088, "25.000 MHz crystal, 18pF, ±30ppm, 5.0 x 3.2 mm"

## Free pads (board coordinates)
  round 0.8 smd far side: 0(-62.098,-5.881) 0(-61.425,-1.65) 0(-60.707,-8.48) 1(-68.411,-14.313) 1(-60.982,-17.73) 2(-73.625,-19.525) 3(-73.3,-4.675)
  round 0.8 smd far side paste-1: 3(-87.05,-15.825) 3(-84.6,-11.925) 3(-71.3,-21.875) 3(-70.75,-25.675) 3(-30.1,-17.15) 3(-29.85,-7.075) 3(-24.9,-10.9) 3(-21,-11.9) 3(-19.05,-16.425) 3(-16.275,-4.125) 3(-15.9,-16.225) 3(-15.625,-9.075) 3(-13.125,-12.675) 3(-9.25,-17.125) 3(-5.45,-12.3) 3(-3.075,-6.55)
  round 3.6 hole 2.7 paste-2.6: 666(-87.65,-132.65) 666(-87.65,-2.35) 666(-2.35,-132.65) 666(-2.35,-2.35)

## Via types
v1: diameter 0.55, hole 0.25, Top Layer LF-Signals to Bottom Layer LF-Signals, 557 vias
v2: diameter 0.55, hole 0.25, Top Layer LF-Signals to Bottom Layer LF-Signals, tented both sides, 190 vias
v3: diameter 0.55/0.55/0.55/0.8 (per signal layer), hole 0.25, Top Layer LF-Signals to Bottom Layer LF-Signals, tented top, 172 vias
v4: diameter 0.55, hole 0.25, Top Layer LF-Signals to Bottom Layer LF-Signals, tented top, 21 vias
v5: diameter 0.4, hole 0.2, Top Layer LF-Signals to Bottom Layer LF-Signals, tented both sides, 16 vias
v6: diameter 0.7, hole 0.35, Top Layer LF-Signals to Bottom Layer LF-Signals, 9 vias
v7: diameter 0.4, hole 0.2, Top Layer LF-Signals to Bottom Layer LF-Signals, tented top, 5 vias
v8: diameter 0.66, hole 0.33, Top Layer LF-Signals to Bottom Layer LF-Signals, tented top, 4 vias
v9: diameter 0.55/0.55/0.55/0.8 (per signal layer), hole 0.25, Top Layer LF-Signals to Bottom Layer LF-Signals, 2 vias
v10: diameter 0.4, hole 0.2, Top Layer LF-Signals to Bottom Layer LF-Signals, 2 vias

## Nets (pads, with @x,y where several pads share a name; then routed paths per layer and width w, separated by ;. In a path a pad name is that pad's centre, name@x,y a point inside that pad or via, vN(x,y) a via of type N, cw(c..) or ccw(c..) an arc to the next point about the centre after c; other vN are vias at no path point)
ADVREF: C218.1 J500.8@-19.67,-28.73 L200.2 U200.9 | length 61.5
  Top Layer LF-Signals w0.18: v1(-58.25,-44.275) C218.1@-58.25,-45.25 -58.25,-45.267 -56.789,-45.267 -56.772,-45.25 U200.9@-55.6,-45.25 ; L200.2@-58.15,-46.4 C218.1@-58.15,-45.35
  Signal Layer 2 w0.18: v1(-58.25,-44.275) -57.125,-45.4 -54.206,-45.4 -51.286,-42.48 -37.68,-42.48 -36.4,-41.2 -31.925,-41.2 -29.92,-43.205 -29.472,-43.205 -28.951,-43.726 -24.126,-43.726 -20.65,-40.25 -18.6,-40.25 -17.975,-39.625 -17.975,-30.425 J500.8@-19.67,-28.73
AUDIO_AVDD: C820.1 C821.1 L805.2 U800.23 | length 6.1
  Top Layer LF-Signals w0.175: U800.23@-75.4,-109.725 -75.4,-110.15 -75.175,-110.375 -74.725,-110.375 -74.225,-110.875 C821.1@-74.05,-110.875 C820.1@-74.05,-111.975 -74.05,-113.466 L805.2@-73.991,-113.525 -73.991,-114.816 -74,-114.825 -73.975,-114.85 v3(-73.975,-114.875)
AUDIO_CPVDD: C825.1 C826.1 C827.1 L806.2 U800.7 | length 6.4
  Top Layer LF-Signals w0.175: L806.2@-82.825,-104.266 -82.717,-104.374 C825.1@-81.175,-104.374 -81.126,-104.325 C826.1@-79.975,-104.325 C827.1@-78.85,-104.325 -78.85,-104.525 -78.35,-105.025 -77.624,-105.025 -77.4,-105.249 U800.7@-77.4,-105.625
  other v3: -82.025,-104.374
AUDIO_DCVDD: C828.1 C829.1 R819.2 U800.6 | length 6.5
  Top Layer LF-Signals w0.175: U800.6@-77,-105.625 -77,-105.15 -77.75,-104.4 C829.1@-77.75,-103.825 -76.675,-103.825 R819.2@-76.625,-103.875 -75.925,-103.175 -75.925,-101.502 C828.1@-76.352,-101.075
  other v3: -75.925,-101.85
AUDIO_GND: C803.2 C804.2 C808.2 C812.2 C813.2 C814.2 C815.2 C816.2 C817.2 C820.2 C821.2 C825.2 C826.2 C827.2 J800.1 J801.1 R807.1 R808.1 R809.1 R810.1 R812.1 R813.1 R814.2 R815.2 R816.2 U800.9 U800.14 U800.17 U800.22 U800.33 | length 35.1
  Top Layer LF-Signals w0.15: U800.14@-78.45,-108.275 U800.33@-77.1,-108.275 ; U800.9@-78.45,-106.275 -77.8,-106.275 v8(-77,-107.075) ; U800.22@-75.8,-109.725 v8(-75.8,-108.275)
  Top Layer LF-Signals w0.175: R808.1@-87.725,-117.35 C804.2@-85.95,-117.35 ; R810.1@-84.65,-110.4 R809.1@-84.65,-109.25 ; C825.2@-81.175,-102.977 C826.2@-80.223,-102.977 ; C814.2@-80.85,-107.8 C815.2@-80.85,-106.7 ; C826.2@-79.975,-103.225 C827.2@-78.85,-103.225 ; C816.2@-79.674,-112.502 C817.2@-79.674,-111.55 ; C803.2@-78.85,-117.35 R807.1@-77.075,-117.35 -77.075,-118.475 -76.575,-118.975 J800.1@-76.575,-122.075 ; U800.17@-77.8,-109.725 -77.8,-109.075 v8(-77,-108.275) ; C820.2@-72.95,-111.975 C821.2@-72.95,-110.875 ; C812.2@-72.15,-117.45 R812.1@-72.15,-116.125 ; C813.2@-64.975,-117.45 R813.1@-64.975,-116.125
  Top Layer LF-Signals w0.3: R814.2@-83.875,-106.4 v3(-82.025,-106.4)
  Bottom Layer LF-Signals w0.3: v3(-82.025,-106.4) -80.15,-108.275 v8(-77,-108.275) v8(-75.8,-108.275) v8(-75.8,-107.075) v8(-77,-107.075)
AUDIO_MICBIAS: C811.1 R803.2 R804.2 U800.20 | length 13
  Top Layer LF-Signals w0.175: C811.1@-76.6,-112.002 v1(-76.6,-110.863) U800.20@-76.6,-109.725 ; v3(-69.225,-112.3) R803.2@-69.225,-113.7 R804.2@-67.9,-113.7
  Signal Layer 2 w0.175: v1(-76.6,-110.863) -75.926,-111.538 -69.987,-111.538 v3(-69.225,-112.3)
AUDIO_MICVDD: C816.1 C817.1 L804.2 U800.19 | length 5.4
  Top Layer LF-Signals w0.175: L804.2@-78.034,-114.473 L804.2@-78.034,-114.3 -78.325,-114.009 C816.1@-78.325,-112.75 -78.277,-112.701 C817.1@-78.277,-111.55 -77.426,-110.7 -77.425,-110.7 -77,-110.275 U800.19@-77,-109.725
  other v3: -77.665,-110.95
CANH: J1000.1@-60.35,-132.945 R1000.2 U1000.7 | length 21.5
  Top Layer LF-Signals w0.175: J1000.1@-60.35,-132.945 -56.37,-132.945 -52.305,-128.88 R1000.2@-52.305,-127.3 -51.63,-127.3 -50.475,-126.145 -50.475,-122.49 -51.585,-121.38 -53.25,-121.38 -53.625,-121.005 U1000.7@-53.625,-120.492
CANL: J1000.2@-60.35,-130.405 R1001.1 U1000.6 | length 15.6
  Top Layer LF-Signals w0.175: J1000.2@-60.35,-130.405 -57.245,-127.3 R1001.1@-56.28,-127.3 ; R1001.1@-55.605,-127.3 R1001.1@-56.28,-127.3 ; U1000.6@-54.275,-120.492 -54.275,-121.005 -54.65,-121.38 -56.325,-121.38 -57.45,-122.505 -57.45,-126.13 R1001.1@-56.28,-127.3
CAP_CHARGE_EN: pad.0@-62.098,-5.881 Q102.1 R137.1 U105.4 | length 17
  Signal Layer 2 w0.18: v1(-68.875,-11.275) -68.875,-8.247 v1(-65.041,-4.413)
  Bottom Layer LF-Signals w0.18: v1(-68.875,-11.275) -68.875,-12.453 U105.4@-68.865,-12.463 ; R137.1@-67.05,-4.021 -66.503,-4.021 -66.111,-4.413 v1(-65.041,-4.413) -63.573,-5.881 pad.0@-62.098,-5.881 -62.098,-7.068 -62.298,-7.268 Q102.1@-62.168,-7.398
DGI_GPIO0: R911.2 U900.F8 | length 15
  Top Layer LF-Signals w0.15: v3(-26.009,-26.368) -26.009,-24.584 -22.45,-21.025 -22.45,-17.375 -23.65,-16.175 v5(-24.9,-16.175)
  Bottom Layer LF-Signals w0.175: R911.2@-26.009,-27.468 v3(-26.009,-26.368) ; U900.F8@-25.225,-15.85 v5(-24.9,-16.175)
DGI_GPIO1: R912.2 U900.D8 | length 14.1
  Top Layer LF-Signals w0.15: v3(-24.734,-26.368) -24.734,-23.858 -22.15,-21.274 -22.15,-16.975 v5(-23.6,-15.525)
  Bottom Layer LF-Signals w0.15: U900.D8@-23.925,-15.85 v5(-23.6,-15.525)
  Bottom Layer LF-Signals w0.175: R912.2@-24.734,-27.468 v3(-24.734,-26.368)
DGI_GPIO2: R913.2 U900.C10 | length 15.4
  Top Layer LF-Signals w0.15: v3(-23.459,-26.368) -23.459,-23.008 -21.85,-21.399 -21.85,-15.575 v5(-23.425,-14)
  Bottom Layer LF-Signals w0.15: v5(-23.425,-14) -23.275,-14.15 U900.C10@-23.275,-14.55
  Bottom Layer LF-Signals w0.175: R913.2@-23.459,-27.468 v3(-23.459,-26.368)
DGI_GPIO3: R914.2 U900.C9 | length 17.3
  Top Layer LF-Signals w0.15: v5(-23.25,-13.3) -21.55,-15 -21.55,-21.523 -22.184,-22.157 v3(-22.184,-26.368)
  Bottom Layer LF-Signals w0.125: -22.95,-14.875 -22.95,-14.403
  Bottom Layer LF-Signals w0.15: U900.C9@-23.275,-15.2 -22.95,-14.875 ; v5(-23.25,-13.3) -22.95,-13.6 -22.95,-14.403
  Bottom Layer LF-Signals w0.175: R914.2@-22.184,-27.468 v3(-22.184,-26.368)
E\N\A\B\L\E\: pad.3@-84.6,-11.925 Q106.3 Q107.1 R131.2 | length 4.8
  Bottom Layer LF-Signals w0.175: R131.2@-88.175,-13 -87.8,-13.375 Q107.1@-86.775,-13.375 -86.775,-13 -85.825,-12.05 Q106.3@-85.825,-11.875 ; Q106.3@-85.825,-11.6 -85.5,-11.925 pad.3@-84.6,-11.925
EDBG_ADC0: R102.1 R103.2 U900.K10 | length 10.2
  Top Layer LF-Signals w0.15: v3(-33.05,-13.775) -29.775,-13.775 v1(-29.2,-13.2)
  Bottom Layer LF-Signals w0.175: R102.1@-36.6,-12.15 R103.2@-35.325,-12.15 -34.675,-12.15 v3(-33.05,-13.775) ; v1(-29.2,-13.2) -27.85,-14.55 U900.K10@-27.825,-14.55
EDBG_CDC_UART_TX: R910.2 U900.E9 | length 34.3
  Signal Layer 2 w0.175: v3(-31.875,-26.375) -33.534,-24.716 -36.851,-24.716 -37.435,-24.132 -37.435,-23.651 -37.079,-23.294 -22.351,-23.294 -20.26,-21.203 -20.26,-20.165 v5(-24.9,-15.525)
  Bottom Layer LF-Signals w0.15: v5(-24.9,-15.525) U900.E9@-24.575,-15.2
  Bottom Layer LF-Signals w0.175: R910.2@-31.875,-27.475 v3(-31.875,-26.375)
EDBG_FORCE_BOOT: TP901.1 U900.H9 | length 19
  Bottom Layer LF-Signals w0.125: -26.85,-14.875 -26.85,-14.403
  Bottom Layer LF-Signals w0.15: TP901.1@-38.6,-1.5 -37.15,-2.95 -37.15,-4.35 -28.85,-12.65 ; -26.85,-14.875 U900.H9@-26.525,-15.2 ; -26.85,-14.403 -26.85,-14.35
  Bottom Layer LF-Signals w0.175: -28.85,-12.65 -28.35,-12.65 -26.85,-14.15 -26.85,-14.35
EDBG_JTAG_TCK: TP902.1 U900.K9 | length 19.5
  Bottom Layer LF-Signals w0.15: TP902.1@-41.6,-3.5 -40.6,-4.5 -40,-4.5 -38.052,-4.5 -30.025,-12.527 -30.025,-13.95 -28.775,-15.2 U900.K9@-27.825,-15.2
EDBG_JTAG_TDI: TP903.1 U900.K8 | length 18.9
  Bottom Layer LF-Signals w0.15: TP903.1@-41.6,-5.5 -40.575,-6.525 -36.876,-6.525 -30.625,-12.776 -30.625,-14.225 -29,-15.85 U900.K8@-27.825,-15.85
EDBG_JTAG_TDO: TP904.1 U900.J8 | length 16.6
  Bottom Layer LF-Signals w0.125: -27.972,-15.525 -27.678,-15.525
  Bottom Layer LF-Signals w0.15: TP904.1@-38.6,-5.5 -37.476,-5.5 -30.325,-12.651 -30.325,-14.101 -28.901,-15.525 -27.972,-15.525 ; -27.678,-15.525 -27.5,-15.525 U900.J8@-27.175,-15.85
EDBG_JTAG_TMS: TP905.1 U900.H7 | length 23.1
  Bottom Layer LF-Signals w0.125: -28.075,-16.175 -26.85,-16.175 U900.H7@-26.525,-16.5
  Bottom Layer LF-Signals w0.15: TP905.1@-41.6,-7.5 -42.875,-8.775 -42.875,-11.7 -39.9,-14.675 -30.675,-14.675 -29.175,-16.175 -28.075,-16.175
EDBG_RESET_N: TP906.1 U900.J9 | length 17
  Bottom Layer LF-Signals w0.125: -27.99,-14.875 -27.5,-14.875
  Bottom Layer LF-Signals w0.15: TP906.1@-38.596,-3.496 -29.725,-12.367 -29.725,-13.625 -28.475,-14.875 ; -27.5,-14.875 U900.J9@-27.175,-15.2
  Bottom Layer LF-Signals w0.175: -28.475,-14.875 -27.99,-14.875
EDBG_SPI_DGI_MISO: R915.1 U900.K2 | length 11.6
  Bottom Layer LF-Signals w0.15: -28.975,-21.025 -28.975,-20.9 U900.K2@-27.825,-19.75
  Bottom Layer LF-Signals w0.175: R915.1@-33.475,-27.475 v3(-33.475,-26.375) -32.2,-25.1 -29.65,-25.1 -28.975,-24.425 -28.975,-21.025
EDBG_TARGET_RESET: Q101.3 U900.B4 | length 14.3
  Top Layer LF-Signals w0.175: v3(-19.075,-19.25) -18.716,-19.609 -14.595,-19.609 -13.538,-18.552 -13.538,-16.371 -14.357,-15.552 Q101.3@-15.274,-15.552
  Bottom Layer LF-Signals w0.125: U900.B4@-22.625,-18.45 -22.3,-18.775 -21.725,-18.775
  Bottom Layer LF-Signals w0.175: -21.725,-18.775 -19.55,-18.775 v3(-19.075,-19.25)
EDBG_USB_FS_N: R916.2 U900.B9 | length 3.7
  Bottom Layer LF-Signals w0.125: U900.B9@-22.626,-15.224 U900.B9@-22.614,-15.211 ; -22.277,-14.875 -21.725,-14.875
  Bottom Layer LF-Signals w0.175: U900.B9@-22.625,-15.2 -22.3,-14.875 -22.277,-14.875 ; -21.725,-14.873 -21.723,-14.873 -21.275,-14.424 -21.275,-14 R916.2@-20.175,-12.9
EDBG_USB_FS_P: R917.2 U900.B8 | length 2.7
  Bottom Layer LF-Signals w0.125: -22.323,-16.176 -21.807,-16.176
  Bottom Layer LF-Signals w0.175: U900.B8@-22.625,-15.85 -22.625,-15.875 -22.323,-16.176 ; -21.807,-16.177 -21.427,-16.177 -21.15,-15.9 R917.2@-20.175,-15.9
EDBG_USB_HS_N: D902.3 J900.2 R916.1 U900.A9 | length 16.2
  Top Layer LF-Signals w0.175: J900.2@-15,-5.025 -15.075,-5.1 -15.075,-8.328 D902.3@-14.435,-8.968
  Top Layer LF-Signals w0.18: v1(-18.814,-14.414) -18.814,-14.014 -15.225,-10.425 -15.122,-10.322 -15.122,-9.428 -14.662,-8.968 -14.435,-8.968 -14.315,-8.968 D902.3@-14.225,-8.878
  Bottom Layer LF-Signals w0.18: U900.A9@-21.975,-15.2 -21.587,-15.2 -20.907,-14.52 -20.905,-14.52 -20.485,-14.1 -19.975,-14.1 R916.1@-20.175,-13.9 -19.328,-13.9 v1(-18.814,-14.414)